# Altium PCB manette_temp.PCBDOC
Units mm, origin at the board's own origin, x right, y up, seen from the top; angles counter-clockwise.
Board outline 299.72 x 199.9 mm, 2 copper layers (Top Layer, Bottom Layer); 38 components, 38 nets, 130 pads, 18 vias.
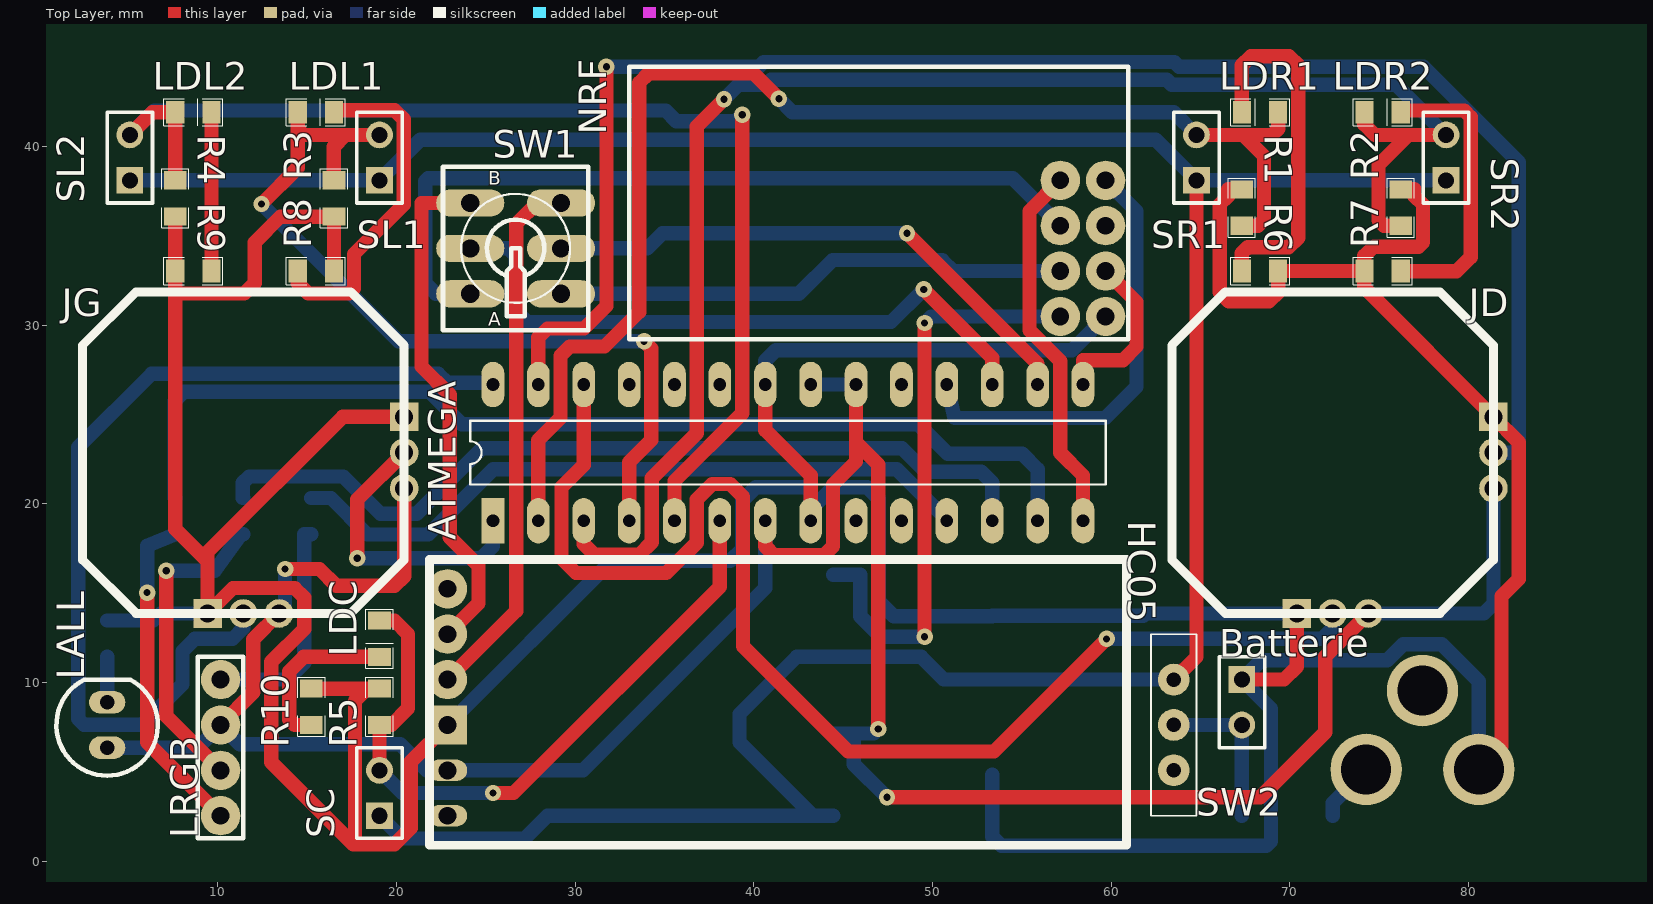
[diagram p0: Top Layer view]
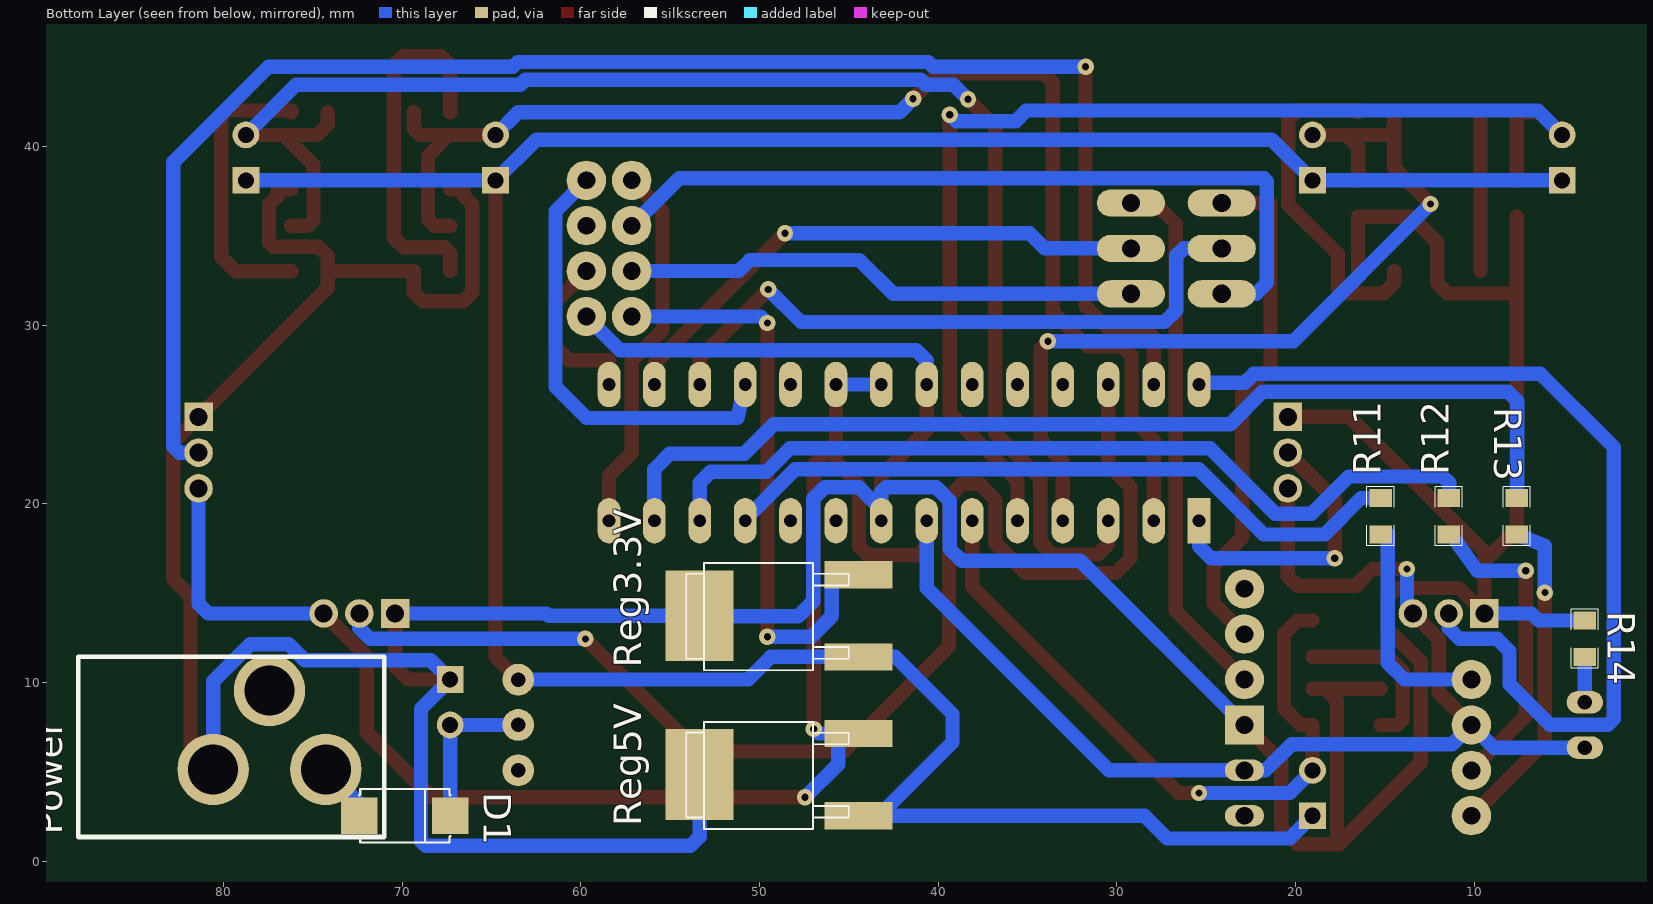
[diagram p1: Bottom Layer view, seen from below]

## Layer stack, top to bottom
Top Solder: solder mask 0.0102, Solder Resist, Dk 3.5
Top Layer: signal copper 0.0356
Dielectric1: dielectric 0.32, FR-4, Dk 4.8
Bottom Layer: signal copper 0.0356
Bottom Solder: solder mask 0.0102, Solder Resist, Dk 3.5

## Board outline
-141.655,-46.39 158.065,-46.39 158.065,153.508 -141.655,153.508

## Design rules (kind name [scope] priority, off if disabled: settings)
Clearance Clearance_bottom_polygon [OnLayer('Bottom Layer') Or OnLayer('Multi-Layer') vs OnLayer('Bottom Layer')  And  InPoly] p1: gap=0.508
Clearance Clearance_top_polygon [OnLayer('Top Layer')  Or OnLayer('Multi-Layer') vs OnLayer('Top Layer') And InPoly] p2: gap=0.508
Clearance Clearance_bottom [OnLayer('Bottom Layer') Or OnLayer('Multi-Layer') vs OnLayer('Bottom Layer')  And Not InPoly] p3: gap=0.203
Clearance Clearance_top [OnLayer('Top Layer')  Or OnLayer('Multi-Layer') vs OnLayer('Top Layer') And Not InPoly] p4: gap=0.203
Clearance Clearance_pad_to_pad [OnLayer('Multi-Layer') vs OnLayer('Multi-Layer')] p5: gap=0.254
ComponentClearance ComponentClearance_bottom [OnLayer('Bottom Overlay') vs OnLayer('Bottom Overlay')] p1: gap=0 collisioncheckmode=3 verticalgap=0.254 showdistances=FALSE
ComponentClearance ComponentClearance_top [OnLayer('Top Overlay') vs OnLayer('Top Overlay')] p2: gap=0 collisioncheckmode=3 verticalgap=0.254 showdistances=FALSE
FabricationTestPointUsage TestPointUsage [All] p1: valid=0 allowmultiple=FALSE
FabricationTestpoint Testpoint [All] p1: side=3 testpointundercomponent=TRUE minsize=1.016 maxsize=2.54 preferedsize=1.524 minholesize=0 maxholesize=1.016 preferedholesize=0.813 testpointgrid=0.025 allowsidetop=TRUE allowsidebottom=TRUE usegrid=TRUE gridtolerance=0
HoleSize [All] p1: absolutevalues=TRUE maxlimit=25.4 minlimit=0.406 maxpercent=80.000 minpercent=20.000
MinimumAnnularRing [PadXSize_AllLayers = PadYSize_AllLayers] p1: minimumring=0.254
PermittedLayers [All] p1: toplayerpermitted=TRUE bottomlayerpermitted=TRUE
PolygonConnect [All] p1: connectstyle=Relief reliefconductorwidth=0.61 reliefentries=4 polygonreliefangle="90 Angle" airgapwidth=0.254
RoutingVias [All] p1: holewidth=0.406 width=0.914 viastyle="Through Hole" minholewidth=0.406 minwidth=0.914 maxholewidth=25.4 maxwidth=25.4
SMDNeckDown [All] p1: percent=90.000
SMDToPlane [All] p1: distance=0
SolderMaskExpansion [All] p1: expansion=0.102
ViasUnderSMD [All] p1: allowed=FALSE
Width [All] p1: maxlimit=1 minlimit=0.254 preferedwidth=0.8 minimp=50.000000 maximp=50.000000 favimp=50.000000
Width Width_botom_top [OnLayer('Bottom Layer') or OnLayer('Top Layer')] p2: maxlimit=254 minlimit=0.254 preferedwidth=0.813
26 further rules are at their usual default settings.

## Components (designator, comment, footprint, x,y, rotation, side; value= is the part's Value field where it differs from the comment)
ATMEGA "ATMEGA328P-PU" DIP28_300 25.4,19.05 r90 top
Batterie "Header 2" HDR1X2#1 67.31,7.62 r90 top
D1 "Vseuil>0.6V" SMA 72.39,2.54 r180 bottom
HC05 "HC05" HC05 22.86,8.89 r270 top
JD "Joystick2axes" Joystick2axes 72.39,22.86 r0 top
JG "Joystick2axes" Joystick2axes 11.43,22.86 r0 top
LALL "comment" LED5 3.81,8.89 r180 top
LDC "comment" LED0805 19.05,11.43 r90 top
LDL1 "comment" LED0805 16.51,41.91 r180 top
LDL2 "comment" LED0805 9.652,41.91 r180 top
LDR1 "comment" LED0805 67.31,41.91 r0 top
LDR2 "comment" LED0805 76.2,41.91 r180 top
LRGB "RGB+" "Led RGB" 10.16,10.16 r270 top
NRF "NRF24" NRF24 59.69,30.48 r180 top
Power "Connecteur Power" "Connecteur Power" 71.12,11.43 r0 bottom
R1 "RES" 0805 67.31,35.56 r90 top
R2 "RES" 0805 76.2,35.56 r90 top
R3 "RES" 0805 16.51,38.1 r270 top
R4 "RES" 0805 7.62,38.1 r270 top
R5 "RES" 0805 19.05,7.62 r90 top
R6 "RES" 0805 67.31,33.02 r0 top
R7 "RES" 0805 76.2,33.02 r180 top
R8 "RES" 0805 16.51,33.02 r180 top
R9 "RES" 0805 9.652,33.02 r180 top
R10 "RES" 0805 15.24,7.62 r90 top
R11 "RES" 0805 15.24,20.32 r270 bottom
R12 "RES" 0805 11.43,20.32 r270 bottom
R13 "RES" 0805 7.62,20.32 r270 bottom
R14 "RES" 0805 3.81,11.43 r90 bottom
Reg3.3V "78xx" TO252 44.45,11.43 r90 bottom
Reg5V "78xx" TO252 44.45,2.54 r90 bottom
SC "Header 2" HDR1X2#2 19.05,2.54 r90 top
SL1 "Header 2" HDR1X2#2 19.05,38.1 r90 top
SL2 "Header 2" HDR1X2#2 5.08,38.1 r90 top
SR1 "Header 2" HDR1X2#2 64.77,38.1 r90 top
SR2 "Header 2" HDR1X2#2 78.74,38.1 r90 top
SW1 "SW_DPDT" dpdt_bascule 24.13,34.29 r0 top (schematic designator SW?)
SW2 "SW_SPDT" 1K2_V 63.5,7.62 r0 top (schematic designator SW?)

## Footprints (in the part's own frame and the unit in brackets; to place one, negate y for a bottom-side part, rotate by r counter-clockwise, add the part's x,y. Pads: shape width x height; smd on the part's side, far side on the other; paste and mask are expansions set on the pad)
1K2_V [mil]
  round 70 hole 32: 1(0,0) 2(0,100) 3(0,-100)
  silkscreen extent -50,-200 50,200
0805 [mil]
  rect 40x50 smd: 1(0,0) 2(80,0)
  silkscreen extent -25,-30 105,30
"Connecteur Power" [mm]
  round 4 hole 2.8: 0(3.15,6.3) 1(9.45,6.3) 2(6.3,1.89)
  silkscreen extent -0.13,0 17.01,10.08
DIP28_300 [mil]
  rect 100x50 hole 28: 1(0,0)
  oval 100x50 hole 28: 2(0,-100) 3(0,-200) 4(0,-300) 5(0,-400) 6(0,-500) 7(0,-600) 8(0,-700) 9(0,-800) 10(0,-900) 11(0,-1000) 12(0,-1100) 13(0,-1200) 14(0,-1300) 15(300,-1300) 16(300,-1200) 17(300,-1100) 18(300,-1000) 19(300,-900) 20(300,-800) 21(300,-700) 22(300,-600) 23(300,-500) 24(300,-400) 25(300,-300) 26(300,-200) 27(300,-100) 28(300,0)
  silkscreen extent 80,-1350 220,50
dpdt_bascule [mil]
  oval 150x60 hole 40: 1(0,0) 2(0,100) 3(0,-100) 4(200,0) 5(200,100) 6(200,-100)
  silkscreen extent -60,-180 260,180
HC05 [mm]
  round 2.2 hole 1: 1(-6.35,0) 2(-3.81,0) 3(-1.27,0)
  rect 2.2x2.2 hole 1: 4(1.27,0)
  oval 1.2x2.2 hole 1: 5(3.81,0) 6(6.35,0)
  silkscreen extent -8,-1 8,38
HDR1X2#1 [mm] "Connector; Header; 2 Position"
  round 1.5 hole 0.9: 1(0,0)
  rect 1.5x1.5 hole 0.9: 2(2.54,0)
  silkscreen extent -1.27,-1.27 3.81,1.27
HDR1X2#2 [mm] "Connector; Header; 2 Position"
  rect 1.5x1.5 hole 0.9: 1(0,0)
  round 1.5 hole 0.9: 2(2.54,0)
  silkscreen extent -1.27,-1.27 3.81,1.27
Joystick2axes [mm]
  round 1.6 hole 1: 1(2,-9) 1(9,-2) 2(9,0) 3(0,-9)
  rect 1.6x1.6 hole 1: 4(-2,-9) 4(9,2)
  silkscreen extent -9,-9 9,9
LED5 [mil] "5mm LED"
  oval 80x50 hole 32 unplated: A(0,100) K(0,0)
  silkscreen extent -112,-50 112,162
LED0805 [mil]
  rect 40x50 smd: A(80,0) K(0,0)
  silkscreen extent -25,-30 105,30
"Led RGB" [mm]
  round 2.2 hole 1: 1(0,0) 2(2.54,0) 3(5.08,0) 4(7.62,0)
  silkscreen extent -1.27,-1.27 8.89,1.27
NRF24 [mm]
  round 2.2 hole 1: 1(0,0) 2(2.54,0) 3(0,-2.54) 4(2.54,-2.54) 5(0,-5.08) 6(2.54,-5.08) 7(0,-7.62) 8(2.54,-7.62)
  silkscreen extent -1.27,-13.97 26.67,1.27
SMA [mil]
  rect 80x80 smd: 1(0,0) 2(200,0)
  silkscreen extent 0,-59 200,59
TO252 [mm]
  rect 1.524x3.81 smd: 1(0,0) 3(4.6,0)
  rect 5.08x3.81 smd: 2(2.3,8.9)
  silkscreen extent -0.75,0.55 5.25,9.65

## Part data
Batterie SC SL1 SL2 SR1 SR2: "Header, 2-Pin"
D1: library part DIODE, "diode usage général"
LALL LDC LDL1 LDL2 LDR1 LDR2: library part LED, "LED 5mm/3mm/CMS"
R1 R2 R3 R4 R5 R6 R7 R8 R9 R10 R11 R12 R13 R14: "resistance"
Reg3.3V Reg5V: library part REG_POS, "régulateur positif fixe"

## Via types
v1: diameter 0.914, hole 0.406, Top Layer to Bottom Layer, 18 vias

## Nets (pads, with @x,y where several pads share a name; then routed paths per layer and width w, separated by ;. In a path a pad name is that pad's centre, name@x,y a point inside that pad or via, vN(x,y) a via of type N, cw(c..) or ccw(c..) an arc to the next point about the centre after c; other vN are vias at no path point)
3.3V: NRF.2 Reg3.3V.3 | length 33.2
  Top Layer w0.8: v1(49.556,12.563) v1(49.556,30.115)
  Bottom Layer w0.8: Reg3.3V.3 45.949,16.03 45.949,13.706 47.092,12.563 v1(49.556,12.563) ; v1(49.556,30.115) 49.921,30.48 NRF.2
5V: ATMEGA.7 ATMEGA.20 ATMEGA.21 HC05.5 JD.1 JG.1 LALL.A LRGB.2 Reg5V.3 | length 157.5
  Top Layer w0.8: LRGB.2 11.99,9.45 11.99,12.42 JG.1@13.43,13.86 ; v1(13.768,16.348) 15.698,16.348 16.638,15.408 19.889,15.408 20.43,15.949 JG.1@20.43,20.86 ; ATMEGA.7 40.64,17.618 41.148,17.11 43.917,17.11 44.425,17.618 44.425,21.073 45.72,22.368 45.72,23.435 ; ATMEGA.20 45.72,23.435 ; v1(46.965,7.394) 46.965,22.19 45.72,23.435 ; v1(47.448,3.572) 68.342,3.572 71.984,7.214 71.984,11.454 JD.1@74.39,13.86
  Bottom Layer w0.8: LALL.A 8.89,6.35 LRGB.2 11.236,6.544 20.219,6.544 21.683,5.08 HC05.5 30.44,5.08 40.64,15.28 ATMEGA.7 ; JG.1@13.43,13.86 13.768,14.198 v1(13.768,16.348) ; ATMEGA.21 ATMEGA.20 ; Reg5V.3 Reg5V.3@45.594,7.14 ; v1(46.965,7.394) 46.711,7.14 Reg5V.3@45.594,7.14 ; v1(47.448,3.572) 45.594,5.426 Reg5V.3@45.594,7.14 ; JD.1@74.39,13.86 80.849,13.86 81.39,14.401 JD.1@81.39,20.86
BATTERIE: Batterie.1 D1.2 SW2.1 | length 8.9
  Bottom Layer w0.8: SW2.1 Batterie.1 D1.2
CE: ATMEGA.15 NRF.3 | length 9.6
  Top Layer w0.8: ATMEGA.15 58.42,28.032 60.656,28.032 61.418,28.794 61.418,31.292 NRF.3
CSN: NRF.4 SW1.6 | length 29
  Bottom Layer w0.8: SW1.6 42.52,31.75 44.409,33.639 50.536,33.639 51.155,33.02 NRF.4
D10: ATMEGA.16 SW1.4 | length 31.2
  Top Layer w0.8: v1(48.569,35.144) 55.88,27.833 ATMEGA.16
  Bottom Layer w0.8: SW1.4 34.037,34.29 34.891,35.144 v1(48.569,35.144)
D11: ATMEGA.17 SW1.1 | length 36.5
  Top Layer w0.8: v1(49.505,31.994) 53.34,28.16 ATMEGA.17
  Bottom Layer w0.8: SW1.1 26.255,34.29 26.671,33.874 26.671,30.826 27.331,30.166 47.677,30.166 v1(49.505,31.994)
GND: ATMEGA.8 ATMEGA.22 Batterie.2 HC05.4 JD.4 JG.4 NRF.1 Power.1 R1.2 R2.2 R3.2 R4.2 R5.2 R6.2 R7.2 R8.1 R9.2 R10.2 R14.2 Reg3.3V.2 Reg5V.2 | length 309.9
  Top Layer w0.8: R4.2 R9.2 7.62,31.766 ; R10.2 18.349,9.652 ; R8.1 R3.2 13.513,36.068 12.066,34.621 12.066,32.35 11.482,31.766 7.62,31.766 ; 17.578,0.943 12.993,5.528 12.993,11.154 14.834,12.995 14.834,14.748 14.301,15.281 10.851,15.281 9.43,13.86 9.43,16.776 ; R5.2 18.349,9.652 ; JG.4@20.43,24.86 16.996,24.86 9.43,17.294 9.43,16.776 ; HC05.4 20.803,5.563 20.803,1.857 19.889,0.943 17.679,0.943 17.679,8.982 18.349,9.652 ; ATMEGA.22 40.64,24.12 43.18,21.58 ATMEGA.8 ; Batterie.2 69.673,10.16 70.39,10.877 JD.4@70.39,13.86 ; R1.2 66.549,37.592 66.549,37.227 66.066,36.744 66.066,31.842 66.574,31.334 68.834,31.334 69.342,31.842 R6.2 R7.2 ; R2.2 76.963,37.592 76.963,37.227 77.445,36.744 77.445,34.636 77.191,34.382 74.676,34.382 74.168,33.874 R7.2 ; Power.1 81.84,6.4 81.84,14.824 82.805,15.789 82.805,23.445 81.39,24.86 74.168,32.082 R7.2 ; 7.62,31.766 7.62,18.586 9.43,16.776
  Bottom Layer w0.8: R14.2 6.402,13.462 6.8,13.86 JG.4@9.43,13.86 ; HC05.4 32.045,16.805 38.685,16.805 39.345,17.466 39.345,20.158 40.111,20.923 42.923,20.923 43.18,20.666 ATMEGA.8@43.18,19.675 ; ATMEGA.22 40.64,28.005 41.225,28.59 57.8,28.59 NRF.1 ; ATMEGA.8 ATMEGA.8@43.18,19.675 ; Reg5V.2 53.35,1.362 53.858,0.854 68.682,0.854 68.936,1.108 68.936,8.534 Batterie.2 68.393,11.243 75.441,11.243 76.342,12.143 78.498,12.143 80.57,10.071 Power.1 ; JD.4@70.39,13.86 61.929,13.86 61.799,13.73 Reg3.3V.2 53.35,13.706 47.829,13.706 46.991,14.545 46.991,20.285 46.353,20.923 44.428,20.923 ATMEGA.8@43.18,19.675
IRQ: ATMEGA.14 NRF.8 | length 21
  Top Layer w0.8: NRF.8 55.424,36.374 55.424,29.708 57.151,27.981 57.151,22.85 58.42,21.581 ATMEGA.14
JDX: ATMEGA.27 JD.2 | length 91.5
  Top Layer w0.8: ATMEGA.27 27.94,29.302 28.448,29.81 30.49,29.81 31.75,31.07 v1(31.75,44.45)
  Bottom Layer w0.8: v1(31.75,44.45) 40.272,44.45 40.548,44.726 63.521,44.726 63.797,44.45 77.47,44.45 82.805,39.115 82.805,23.206 82.459,22.86 JD.2
JDY: ATMEGA.26 JD.3 | length 72
  Top Layer w0.8: ATMEGA.26 30.48,22.165 29.236,20.921 29.236,16.932 30.049,16.119 35.104,16.119 36.805,17.821 36.805,20.239 37.669,21.102 38.685,21.102 39.396,20.391 39.396,12.03 45.289,6.137 53.442,6.137 v1(59.742,12.436)
  Bottom Layer w0.8: v1(59.742,12.436) 71.78,12.436 72.39,13.046 JD.3
JGX: ATMEGA.1 JG.2 | length 16.3
  Top Layer w0.8: v1(17.806,16.943) 17.806,20.236 JG.2
  Bottom Layer w0.8: v1(17.806,16.943) 24.725,16.943 25.4,17.618 ATMEGA.1
JGY: ATMEGA.28 JG.3 | length 53.9
  Bottom Layer w0.8: JG.3 11.43,13.046 10.82,12.436 8.713,12.436 8.027,11.751 8.027,9.896 5.767,7.636 2.515,7.636 2.185,7.966 2.185,23.155 6.296,27.266 22.346,27.266 22.836,26.776 25.4,26.776 ATMEGA.28
LDB: ATMEGA.13 R13.1 | length 58.6
  Bottom Layer w0.8: R13.1 7.595,20.32 7.595,25.746 8.113,26.263 21.845,26.263 23.657,24.451 49.201,24.451 50.852,22.8 55.017,22.8 55.881,21.936 ATMEGA.13
LDG: ATMEGA.12 R12.1 | length 48.3
  Bottom Layer w0.8: R12.1 11.405,20.32 11.405,21.174 11.761,21.53 17.019,21.53 19.102,19.447 21.134,19.447 24.787,23.1 48.29,23.1 49.607,21.784 52.73,21.784 53.34,21.174 ATMEGA.12
LDR: ATMEGA.11 R11.1 | length 39.1
  Bottom Layer w0.8: R11.1 16.333,20.32 18.372,18.281 21.776,18.281 25.422,21.926 47.993,21.926 50.8,19.12 ATMEGA.11
MISO: ATMEGA.18 NRF.7 | length 25.1
  Bottom Layer w0.8: ATMEGA.18 51.241,24.797 59.665,24.797 61.418,26.549 61.418,36.372 NRF.7
MOSI: NRF.6 SW1.3 | length 45.2
  Bottom Layer w0.8: SW1.3 22.207,31.75 21.607,32.35 21.607,38.055 21.769,38.217 54.493,38.217 NRF.6
NetD1_1: D1.1 Power.0 | length 3.4
  Bottom Layer w0.8: D1.1 72.39,3.25 Power.0
NetLALL_K: LALL.K R14.1 | length 2.5
  Bottom Layer w0.8: LALL.K R14.1
NetLDC_K: LDC.K R10.1 | length 9.5
  Top Layer w0.8: R10.1 14.301,7.62 13.996,7.925 13.996,10.617 14.809,11.43 LDC.K
NetLDL1_K: LDL1.K R8.2 | length 19
  Top Layer w0.8: R8.2 14.478,32.35 15.062,31.766 17.349,31.766 17.628,32.045 17.628,33.969 20.403,36.744 20.403,41.513 19.889,42.027 16.51,42.027 LDL1.K
NetLDL2_K: LDL2.K R9.1 | length 8.9
  Top Layer w0.8: R9.1 LDL2.K
NetLDR1_K: LDR1.K R6.1 | length 20.4
  Top Layer w0.8: R6.1 67.31,34.026 67.639,34.355 69.925,34.355 70.46,34.89 70.46,44.542 69.952,45.05 67.818,45.05 67.31,44.542 LDR1.K
NetLDR2_K: LDR2.K R7.1 | length 16.2
  Top Layer w0.8: R7.1 76.2,33.01 79.325,33.01 80.112,33.798 80.112,41.646 79.757,42.002 76.2,42.002 LDR2.K
NetLRGB_1: LRGB.1 R11.2 | length 12.7
  Bottom Layer w0.8: LRGB.1 13.904,10.16 14.834,11.09 14.834,18.288 R11.2
NetLRGB_3: LRGB.3 R12.2 | length 17.8
  Top Layer w0.8: v1(7.113,16.253) 7.113,8.127 LRGB.3
  Bottom Layer w0.8: v1(7.113,16.253) 9.837,16.253 11.304,18.288 R12.2
NetLRGB_4: LRGB.4 R13.2 | length 18.5
  Top Layer w0.8: v1(6.046,15.027) 6.046,6.654 LRGB.4
  Bottom Layer w0.8: v1(6.046,15.027) 6.046,17.653 R13.2
RX: HC05.2 SW1.2 | length 28.9
  Top Layer w0.8: HC05.2 24.588,14.428 24.588,16.526 22.988,18.126 22.988,26.102 21.406,27.683 21.406,36.823 21.413,36.83 SW1.2
SC: ATMEGA.6 LDC.A R5.1 SC.2 | length 38.6
  Top Layer w0.8: SC.2 19.05,6.34 R5.1 19.721,7.62 20.651,8.55 20.651,12.7 19.889,13.462 LDC.A ; v1(25.4,3.81) 26.553,3.81 38.1,15.357 ATMEGA.6
  Bottom Layer w0.8: SC.2 20.32,3.81 v1(25.4,3.81)
SCK: NRF.5
SDK: ATMEGA.19
SL1: ATMEGA.4 LDL1.A R3.1 SL1.2 | length 48.9
  Top Layer w0.8: v1(12.447,36.77) 14.478,38.801 14.478,40.986 ; LDL1.A 14.478,40.986 ; R3.1 16.485,38.1 16.485,39.97 17.155,40.64 ; SL1.2 17.155,40.64 ; ATMEGA.4 33.02,22.316 34.265,23.562 34.265,28.692 v1(33.859,29.099) ; 14.478,40.986 14.824,40.64 17.155,40.64
  Bottom Layer w0.8: v1(12.447,36.77) 20.118,29.099 v1(33.859,29.099)
SL2: ATMEGA.5 LDL2.A R4.1 SL2.2 | length 66.4
  Top Layer w0.8: SL2.2 6.35,41.91 LDL2.A R4.1 ; ATMEGA.5 35.56,21.276 39.345,25.061 v1(39.345,41.773)
  Bottom Layer w0.8: SL2.2 6.442,42.002 35.069,42.002 35.665,41.406 38.978,41.406 v1(39.345,41.773)
SR1: ATMEGA.2 LDR1.A R1.1 SR1.2 | length 73.1
  Top Layer w0.8: ATMEGA.2 27.94,23.561 29.185,24.806 29.185,28.286 29.693,28.794 31.646,28.794 33.58,30.727 33.58,43.551 34.113,44.085 39.98,44.085 v1(41.403,42.662) ; SR1.2 67.377,40.64 ; R1.1 68.209,35.56 68.555,35.906 68.555,39.462 67.377,40.64 ; LDR1.A 69.342,40.986 68.996,40.64 67.377,40.64
  Bottom Layer w0.8: v1(41.403,42.662) 42.155,41.91 63.5,41.91 SR1.2
SR2: ATMEGA.3 LDR2.A R2.1 SR2.2 | length 86.6
  Top Layer w0.8: ATMEGA.3 30.48,17.746 31.065,17.161 33.605,17.161 34.291,17.847 34.291,21.428 36.805,23.943 36.805,41.113 v1(38.329,42.637) ; LDR2.A 74.168,41.225 74.753,40.64 76.642,40.64 ; R2.1 75.261,35.56 74.956,35.865 74.956,38.954 76.642,40.64 ; SR2.2 76.642,40.64
  Bottom Layer w0.8: v1(38.329,42.637) 39.139,43.447 40.688,43.447 40.964,43.723 63.106,43.723 63.382,43.447 75.933,43.447 SR2.2
TX: HC05.3 SW1.5 | length 30.1
  Top Layer w0.8: HC05.3 26.696,13.996 26.696,35.652 27.874,36.83 SW1.5
VCC: Reg3.3V.1 Reg5V.1 SC.1 SL1.1 SL2.1 SR1.1 SR2.1 SW2.2 | length 164
  Top Layer w0.8: SW2.2 64.77,11.43 SR1.1
  Bottom Layer w0.8: SL2.1 SL1.1 21.326,40.376 62.494,40.376 SR1.1 SR2.1 ; SC.1 20.32,1.27 27.178,1.27 28.448,2.54 Reg5V.1@43.308,2.54 ; Reg5V.1 Reg5V.1@43.308,2.54 ; SW2.2 50.633,10.16 49.363,11.43 Reg3.3V.1 42.393,11.43 39.193,8.23 39.193,6.655 Reg5V.1@43.308,2.54
pads on no net: ATMEGA.9 ATMEGA.10 ATMEGA.23 ATMEGA.24 ATMEGA.25 HC05.1 HC05.6 Power.2 SW2.3

## Keep-outs
Keep-Out Layer:
  rectangle: -135.695,152.27 149.305,157.27
  rectangle: 149.305,-37.73 154.305,157.27
  rectangle: -135.695,-42.73 154.305,-37.73
  rectangle: -140.695,-42.73 -135.695,157.27

## Silkscreen, mask and mechanical layers (free items; w line width, h text height)
Top Overlay:
  text "Les bandes en violet delimitent la surface utilisable...." at -144.907,179.832 h6.35
  text "Mais vous n'etes pas obliges de tout utiliser!!" at -128.651,169.545 h6.35
Mechanical 1:
  lines w0.5: 0,5.08 5.08,0 78.74,0 83.82,5.08 83.82,39.37 77.47,45.72 5.08,45.72 0,40.64 0,5.08

## Text inside footprints (layer, text, board x,y; h text height)
SW1: Top Overlay "A" at 25.146,29.972 h0.76; Top Overlay "B" at 25.146,37.846 h0.76